# Altium PCB E4_TP2_Flyback.PcbDoc
Units mm, origin at the board's own origin, x right, y up, seen from the top; angles counter-clockwise.
Board outline 100 x 70 mm, 2 copper layers (Top Layer, Bottom Layer); 40 components, 26 nets, 119 pads, 6 vias.
Unrouted connection lines stored in the file: 2.
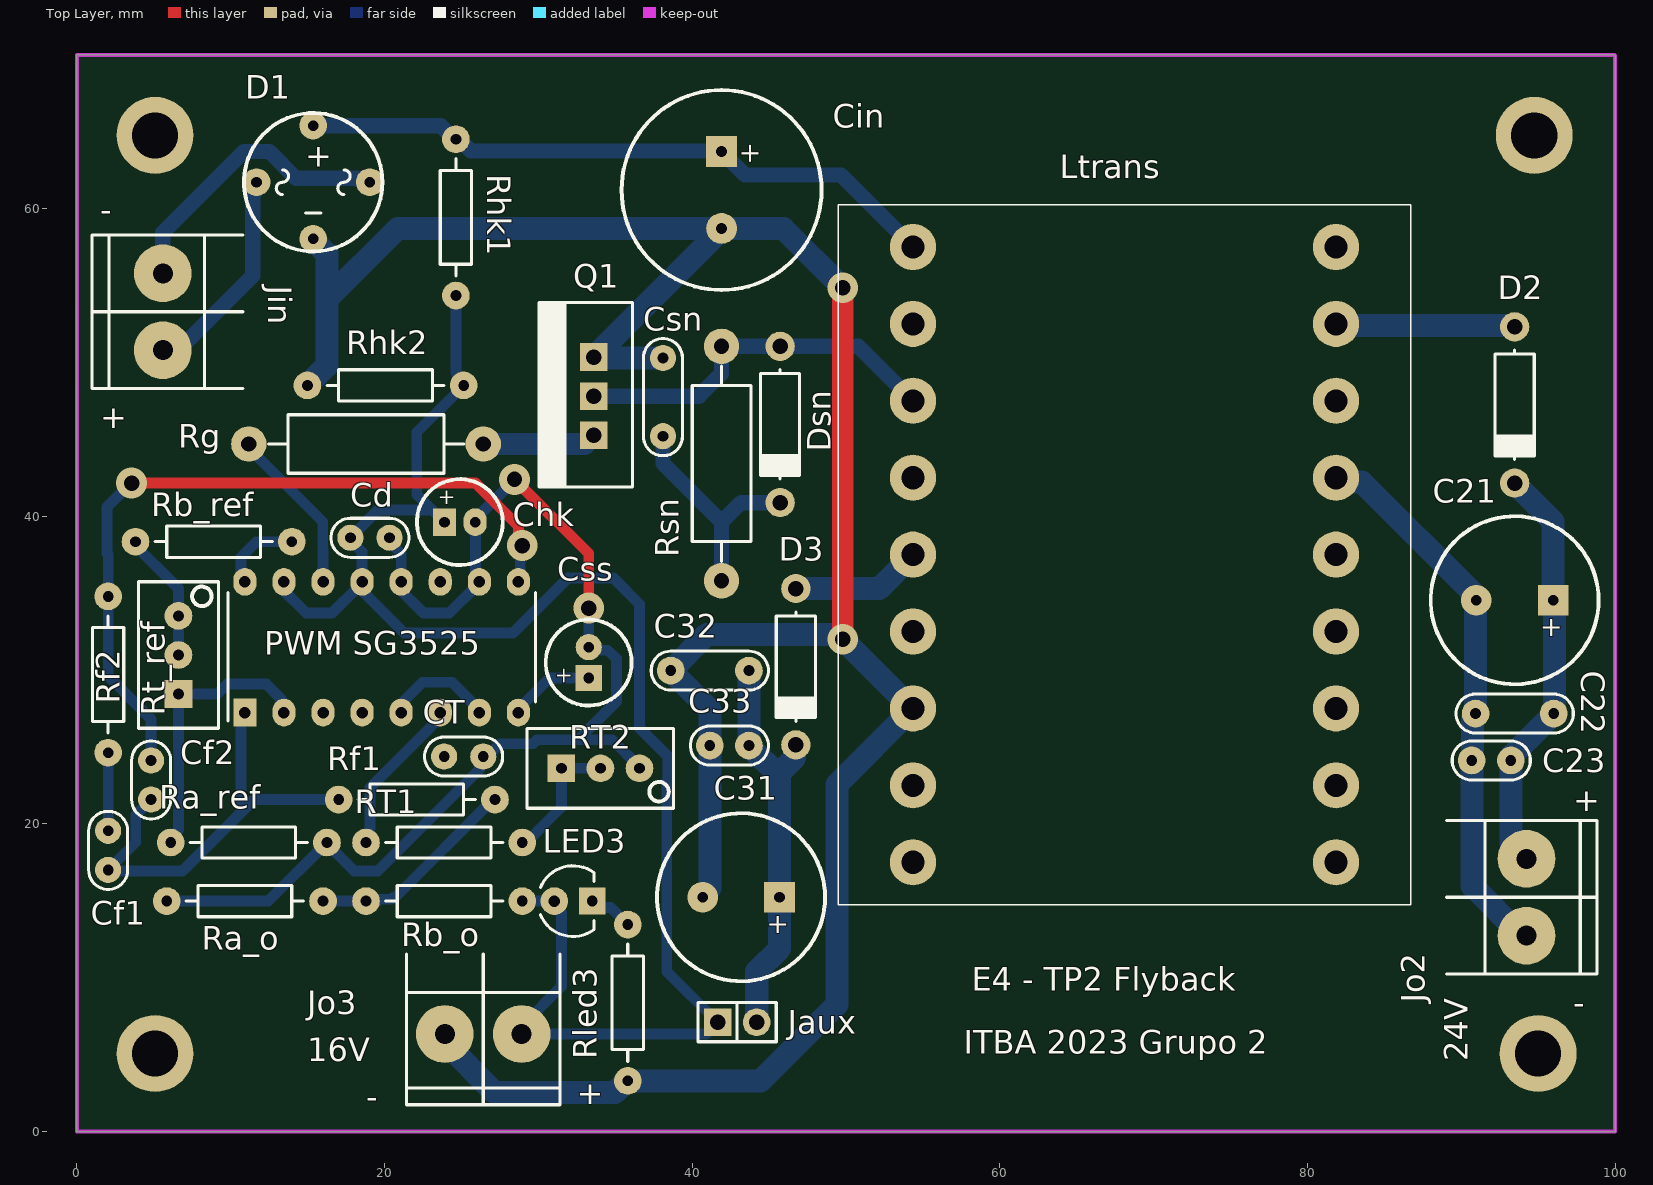
[diagram p0: Top Layer view]
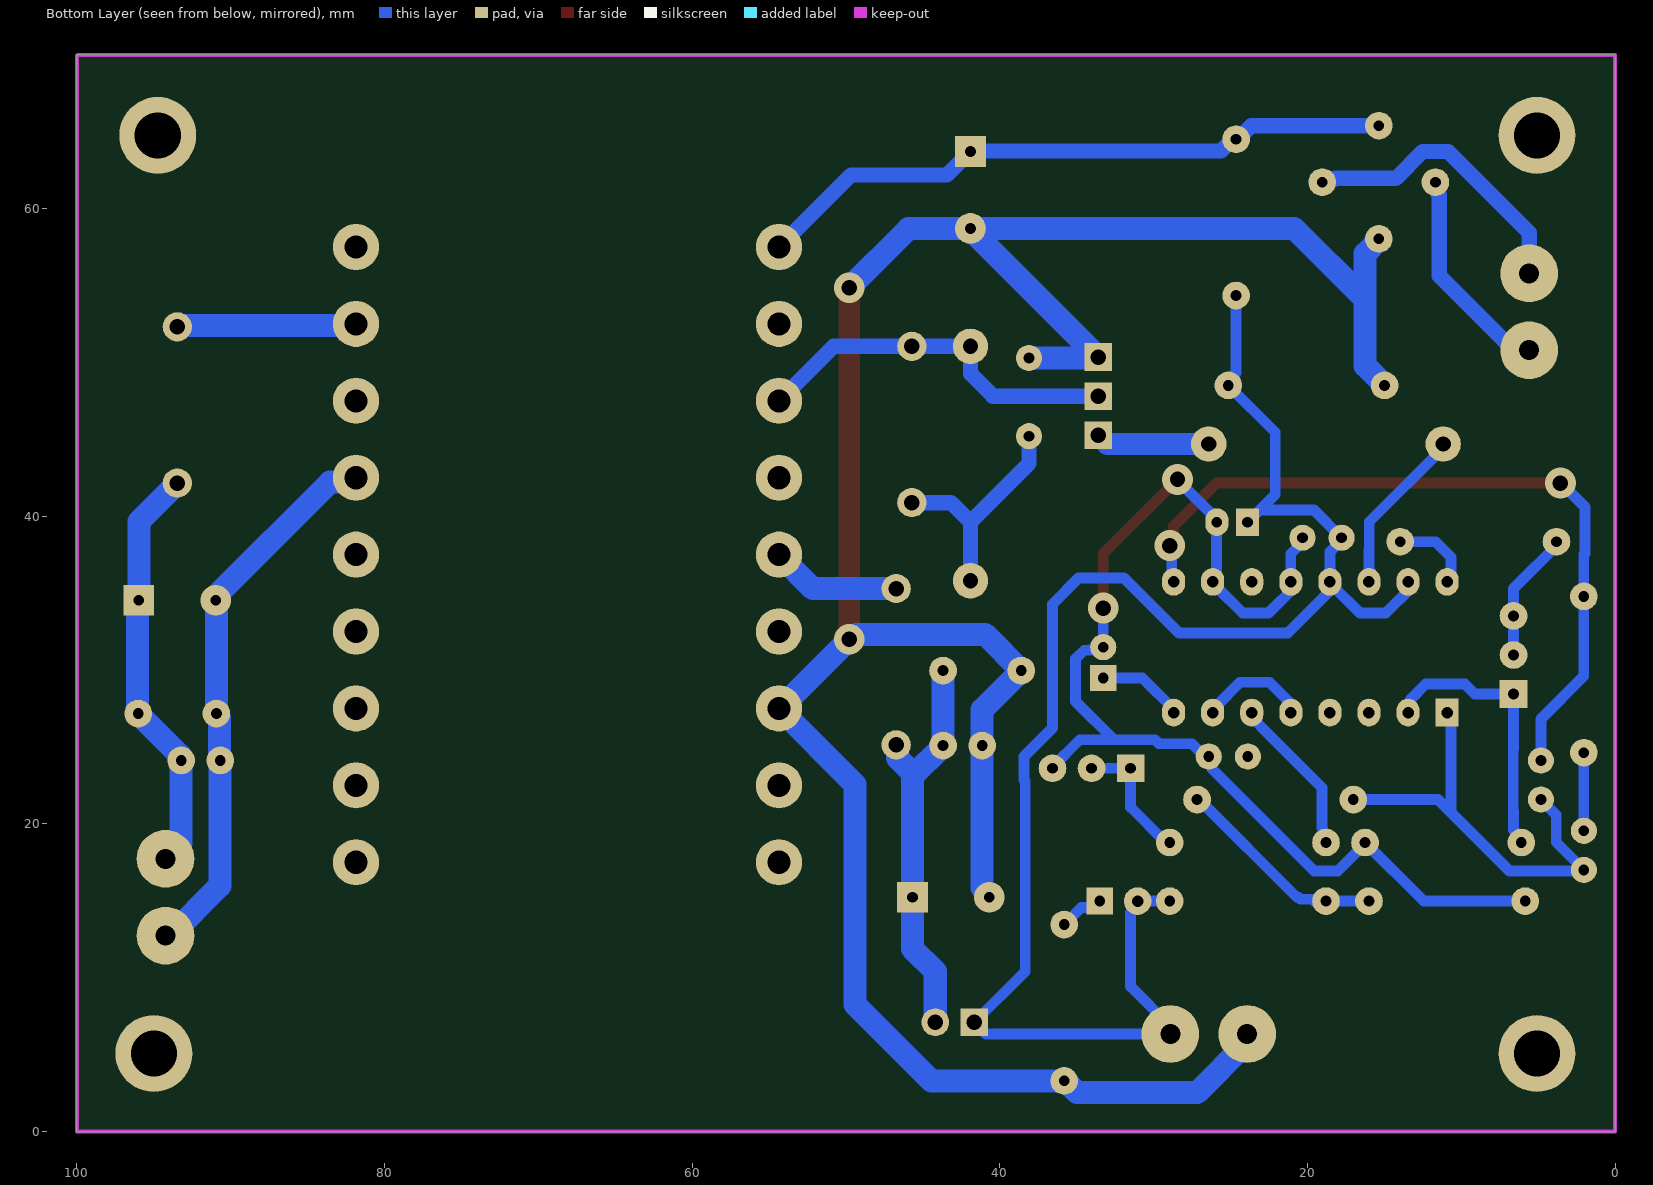
[diagram p1: Bottom Layer view, seen from below]
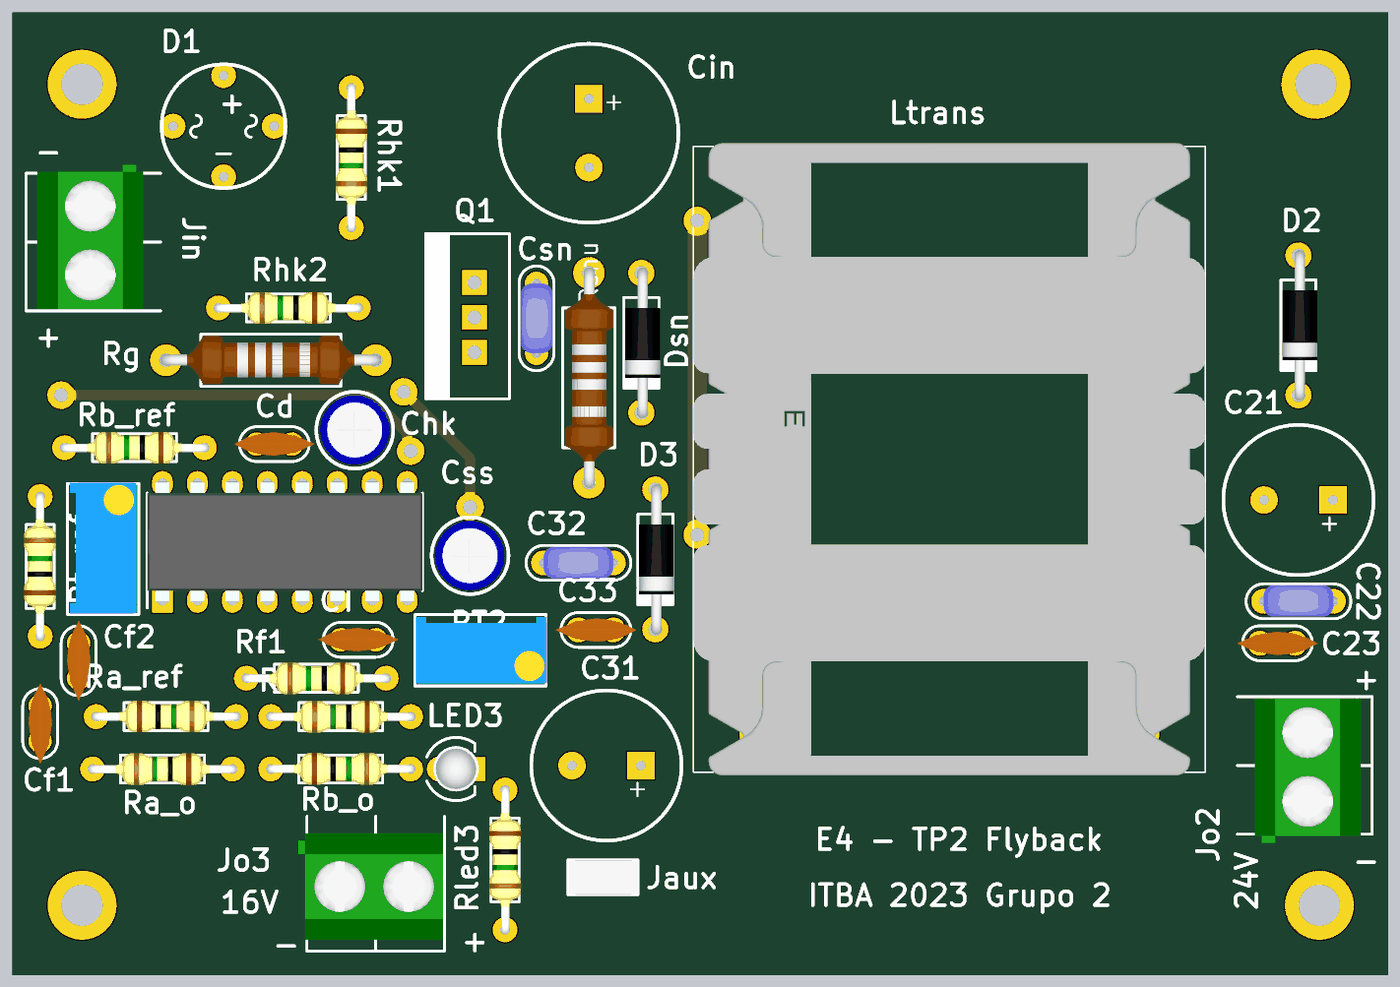
[diagram p2: 3D render of the assembled board from above, using the file's embedded part models]

## Layer stack, top to bottom
Top Solder: solder mask 0.0102, Solder Resist, Dk 3.5
Top Layer: signal copper 0.0356
Dielectric 1: dielectric 0.32, FR-4, Dk 4.8
Bottom Layer: signal copper 0.0356
Bottom Solder: solder mask 0.0102, Solder Resist, Dk 3.5

## Board outline
0,0 0,70 99.972,70 100,69.972 100,0

## Design rules (kind name [scope] priority, off if disabled: settings)
Clearance [All] p1: gap=0.6 ignorepadtopadclearanceinfootprint=FALSE
PolygonConnect [All] p1: connectstyle=Relief reliefconductorwidth=0.254 reliefentries=4 polygonreliefangle="90 Angle" airgapwidth=0.254
RoutingVias [All] p1: holewidth=0.711 width=1.5 viastyle="Through Hole" minholewidth=0.711 minwidth=1.5 maxholewidth=0.711 maxwidth=1.5
SolderMaskExpansion [All] p1: expansion=0.102 istentingtop=FALSE
Width [All] p1: maxlimit=1.5 minlimit=0.7 preferedwidth=0.7
30 further rules are at their usual default settings.

## Classes and differential pairs
component class E4_TP2_Flyback: C21 C22 C23 C31 C32 C33 Cd Cf1 Cf2 Chk Cin Csn CT D1 D2 D3 Dsn Jaux Jin Jo2 Ltrans "PWM SG3525" Ra_ref Rb_o Rb_ref Rf1 Rf2 Rg Rhk1 Rhk2 Rled3 Rsn RT1 RT2 Rt_ref

## Components (designator, comment, footprint, x,y, rotation, side; value= is the part's Value field where it differs from the comment)
C21 "47u" CAP200RP 93.472,34.544 r180 top
C22 "1u" CAP200#1 93.472,27.178 r180 top
C23 "100n" CAP100#1 91.948,24.13 r180 top
C31 "47u" CAP200RP 43.18,15.24 r180 top
C32 "1u" CAP200#1 41.148,29.972 r180 top
C33 "100n" CAP100#1 42.418,25.099 r180 top
Cd "100n" CAP100#2 19.05,38.608 r0 top
Cf1 "53n" CAP100#2 2.032,18.288 r270 top
Cf2 "106p" CAP100#2 4.826,22.86 r270 top
Chk "6.8u" CAP100RP#1 24.892,39.624 r0 top
Cin "220u" CAP200RP2 41.91,61.214 r270 top
Csn "4.7n" CAP200#2 38.1,47.752 r90 top (schematic designator Csnu)
Css "5u" CAP100RP#2 33.274,30.496 r90 top
CT "3.3n" CAP100#2 25.146,24.384 r0 top
D1 "W10M" "PUENTE - W10M" 15.361,65.399 r0 top
D2 "MUR160" DO41 93.472,47.244 r270 top
D3 "MUR160" DO41 46.736,30.226 r270 top
Dsn "DIODO SCHOTTKY" DO41 45.72,45.974 r270 top (schematic designator Dsnu)
Jaux "JUMPER" JUMPER2 42.926,7.112 r0 top
Jin "BORNERA 2" BORNERA2 5.588,53.3 r0 top
Jo2 "BORNERA 2" BORNERA2 94.234,15.24 r180 top
Jo3 "BORNERA 2" BORNERA2 26.416,6.35 r90 top
LED3 "LED" LED3 32.258,14.986 r0 top
Ltrans "B66243B1018T001" B66243B1018T001 68.106,37.512 r270 top
"PWM SG3525" "SG3525AN" DIP850W50P254L2000H510Q16N 19.812,31.496 r90 top (schematic designator PWM)
Q1 "MOSFET N" "TO-220 V" 33.591,47.816 r90 top
Ra_o "5.6k" RES400 16.002,14.986 r180 top
Ra_ref "10k" RES400 6.096,18.796 r0 top
Rb_o "33k" RES400 18.796,14.986 r0 top
Rb_ref "10k" RES400 13.97,38.354 r180 top
Rf1 "520" RES400 27.178,21.59 r180 top
Rf2 "20k" RES400 2.032,24.638 r90 top
Rg "56" RES600 11.176,44.704 r0 top
Rhk1 "500k" RES400 24.638,64.516 r270 top
Rhk2 "27k" RES400 25.146,48.514 r180 top
Rled3 "820" RES400 35.814,13.462 r270 top
Rsn "47" RES600 41.91,51.054 r270 top (schematic designator Rsnu)
RT1 "2k2" RES400 28.956,18.796 r180 top
RT2 "PRESET 1k" "PRESET V" 34.036,23.622 r0 top
Rt_ref "PRESET 5k" "PRESET V" 6.604,30.988 r90 top (schematic designator Rtrim_ref)

## Footprints (in the part's own frame and the unit in brackets; to place one, negate y for a bottom-side part, rotate by r counter-clockwise, add the part's x,y. Pads: shape width x height; smd on the part's side, far side on the other; paste and mask are expansions set on the pad)
B66243B1018T001 [mm]
  round 3 hole 1.5: 1(-20,-13.75) 2(-20,13.75) 3(-15,-13.75) 4(-15,13.75) 5(-10,-13.75) 6(-10,13.75) 7(-5,-13.75) 8(-5,13.75) 9(0,-13.75) 10(0,13.75) 11(5,-13.75) 12(5,13.75) 13(10,-13.75) 14(10,13.75) 15(15,-13.75) 16(15,13.75) 17(20,-13.75) 18(20,13.75)
  silkscreen extent -22.75,-18.6 22.75,18.6, body extent -23,-18.6 23,18.6, height 45.6
BORNERA2 [mm] "Bornera con Tornillos 5mm separación"
  round 3.75 hole 1.3: 1(0,2.5) 2(0,-2.5)
  silkscreen extent -4.6,-5 5.2,5, body extent -3.76,-4.89 3.94,5.61, height 10
CAP100#1 [mm]
  round 1.8 hole 0.7: 1(-1.27,0) 2(1.27,0)
  silkscreen extent -2.54,-1.27 2.54,1.27, body extent -2.92,-0.84 2.92,0.86, height 6.12
CAP100#2 [mm]
  round 1.7 hole 0.7: 1(-1.27,0) 2(1.27,0)
  silkscreen extent -2.54,-1.27 2.54,1.27, body extent -2.92,-0.84 2.92,0.86, height 6.12
CAP100RP#1 [mm] "Body diameter 5mm"
  rect 1.5x1.8 hole 0.7: 1(-1,0)
  oval 1.5x1.8 hole 0.7: 2(1,0)
  silkscreen extent -2.79,-2.79 2.79,2.79, body extent -2.53,-2.51 2.53,2.54, height 11.53
CAP100RP#2 [mm] "Body diameter 5mm"
  rect 1.7x1.7 hole 0.7: 1(-1,0)
  round 1.7 hole 0.7: 2(1,0)
  silkscreen extent -2.79,-2.79 2.79,2.79, body extent -2.53,-2.51 2.53,2.54, height 11.53
CAP200#1 [mm]
  round 1.8 hole 0.7: 1(-2.54,0) 2(2.54,0)
  silkscreen extent -3.81,-1.27 3.81,1.27, body extent -2.79,-1.17 2.79,1.12, height 6.24
CAP200#2 [mm]
  round 1.7 hole 0.7: 1(-2.54,0) 2(2.54,0)
  silkscreen extent -3.81,-1.27 3.81,1.27, body extent -2.79,-1.17 2.79,1.12, height 6.24
CAP200RP [mm] "Body Diameter 10.33mm"
  rect 2x2 hole 0.7: 1(-2.5,0)
  round 2 hole 0.7: 2(2.5,0)
  silkscreen extent -5.46,-5.46 5.46,5.46, body extent -5.2,-5.18 5.18,5.21, height 20
CAP200RP2 [mm] "Body Diameter 12.5mm"
  rect 2x2 hole 0.7: 1(-2.5,0)
  round 2 hole 0.7: 2(2.5,0)
  silkscreen extent -6.5,-6.5 6.5,6.5, body extent -6.25,-6.23 6.2,6.25, height 20
DIP850W50P254L2000H510Q16N [mm]
  rect 1.8x1.5 hole 0.75: 1(-4.25,8.89)
  oval 1.8x1.5 hole 0.75: 2(-4.25,6.35) 3(-4.25,3.81) 4(-4.25,1.27) 5(-4.25,-1.27) 6(-4.25,-3.81) 7(-4.25,-6.35) 8(-4.25,-8.89) 9(4.25,-8.89) 10(4.25,-6.35) 11(4.25,-3.81) 12(4.25,-1.27) 13(4.25,1.27) 14(4.25,3.81) 15(4.25,6.35) 16(4.25,8.89)
  silkscreen extent -4.8,-10 3.55,10, body extent -4.38,-10 4.38,10, height 5.1
DO41 [mm]
  round 1.9 hole 1: 1(-5.08,0) 2(5.08,0)
  silkscreen extent -3.56,-1.27 3.56,1.27, body extent -5.46,-1.19 5.46,1.37, height 2.03
JUMPER2 [mm]
  rect 1.8x1.8 hole 1.016: 1(-1.27,0)
  round 1.8 hole 1.016: 2(1.27,0)
  silkscreen extent -2.54,-1.27 2.54,1.27, body extent -2.46,-1.27 2.54,1.27, height 9.5
LED3 [mm]
  round 1.8 hole 0.75: 1(-1.219,0)
  rect 1.75x1.75 hole 0.7: 2(1.245,0)
  silkscreen extent -2.13,-2.3 1.36,2.3, body extent -1.65,-1.63 1.65,1.66, height 0.49
"PRESET V" [mm]
  rect 1.8x1.8 hole 0.7: 1(-2.54,0)
  round 1.8 hole 0.7: 2(0,0) 3(2.54,0)
  silkscreen extent -4.76,-2.6 4.76,2.6, body extent -4.7,-2.42 4.83,2.42, height 11.55
"PUENTE - W10M" [mm]
  round 1.8 hole 0.7: 1(0,0) 2(-3.677,-3.677) 3(0,-7.354) 4(3.677,-3.677)
  silkscreen extent -4.5,-8.18 4.5,0.82
RES400 [mm]
  round 1.8 hole 0.7: 1(0,0) 2(10.16,0)
  silkscreen extent 1.27,-1.02 8.89,1.02, body extent -0.3,-1.14 10.46,1.17, height 2.43
RES600 [mm]
  round 2.3 hole 1: 1(0,0) 2(15.24,0)
  silkscreen extent 1.27,-1.91 13.97,1.91, body extent -0.4,-1.72 15.64,1.78, height 3.59
"TO-220 V" [mm]
  rect 1.8x1.8 hole 1: 1(-2.54,0) 2(0,0) 3(2.54,0)
  silkscreen extent -5.9,-2.54 6.1,3.54, body extent -5,-2 5,3, height 18

## Part data
C21 C31 Chk Cin Css: library part CAPPOL
C22 C23 C32 C33 Cd Cf1 Cf2 Csn CT: library part CAP
D1: library part PUENTE
D2 D3: library part DIODO
Ltrans: "Inductor", Manufacturer_Name=TDK, Mouser Part Number=N/A, Arrow Part Number=B66243B1018T001, Arrow Price/Stock=https://www.arrow.com/en/products/b66243b1018t001/epcos-tdk, Datasheet Link=https://product.tdk.com/system/files/dam/doc/product/ferrite/ferrite/ferrite-acc/data_sheet/80/db/fer/e_42_21_20.pdf, Height=51mm, Manufacturer_Part_Number=B66243B1018T001, Mouser Price/Stock=https://www.mouser.co.uk/ProductDetail/EPCOS-TDK/B66243B1018T001?qs=W0yvOO0ixfHL1dNOx1DZxg%3D%3D
"PWM SG3525": "Integrated Circuit", Manufacturer_Name=STMicroelectronics, Mouser Part Number=511-SG3525AN, Arrow Part Number=SG3525AN, Arrow Price/Stock=https://www.arrow.com/en/products/sg3525an/stmicroelectronics?region=nac, Datasheet Link=http://componentsearchengine.com/Datasheets/3/SG3525AN.pdf, Height=5.1mm, Manufacturer_Part_Number=SG3525AN, Mouser Price/Stock=https://www.mouser.co.uk/ProductDetail/STMicroelectronics/SG3525AN?qs=lgHKUCmDFthRkkwDjx3E7g%3D%3D
Ra_o Ra_ref Rb_o Rb_ref Rf1 Rf2 Rg Rhk1 Rhk2 Rled3 Rsn RT1: library part RES
RT2 Rt_ref: library part PRESET

## Free pads (board coordinates)
  round 5 hole 3: 2(5.08,64.77) 3(94.742,64.77) 4(5.08,5.08) 5(94.996,5.08)

## Via types
v1: diameter 2, hole 1, Top Layer to Bottom Layer, 6 vias

## Nets (pads, with @x,y where several pads share a name; then routed paths per layer and width w, separated by ;. In a path a pad name is that pad's centre, name@x,y a point inside that pad or via, vN(x,y) a via of type N, cw(c..) or ccw(c..) an arc to the next point about the centre after c; other vN are vias at no path point)
NetC31_1: C31.1 C32.1 C33.1 D3.2 Jaux.2 | length 26.1
  Bottom Layer w1.5: C32.1 C33.1 45.68,23.107 C31.1 45.68,11.898 44.196,10.414 Jaux.2 ; 45.974,23.622 46.659,24.307 46.659,25.069 D3.2
NetCf1_1: Cf1.1 Rf2.1 | length 5.1
  Bottom Layer w0.7: Cf1.1 Rf2.1
NetCf1_2: "PWM SG3525.1" Cf1.2 Cf2.2 Rf1.2 | length 29.2
  Bottom Layer w0.7: Cf1.2@2.032,16.946 6.862,16.946 10.668,20.752 ; Cf1.2 2.038,17.018 3.832,18.812 3.832,20.579 4.826,21.573 Cf2.2@4.826,21.844 ; 10.668,27.06 10.668,20.752 ; Rf1.2 11.506,21.59 10.668,20.752
NetCf2_1: "PWM SG3525.9" Cf2.1 Rf2.2 | length 50.3
  Top Layer w0.7: v1(3.556,42.164) 25.906,42.164 28.707,39.363 28.707,38.349 v1(28.956,38.1)
  Bottom Layer w0.7: v1(3.556,42.164) 3.517,42.164 1.96,40.607 1.96,37.588 2.032,37.516 Rf2.2 2.032,29.622 4.826,26.828 Cf2.1 ; 28.448,35.56 28.601,35.713 ; 28.702,35.746 28.829,35.873 28.829,37.973 v1(28.956,38.1)
NetCsnu_1: Csn.1 Dsn.2 Rsn.2 | length 15.8
  Bottom Layer w0.7: Dsn.2@45.72,40.943 Dsn.2@45.998,40.664
  Bottom Layer w1: Csn.1 38.1,43.434 41.91,39.624 ; Rsn.2 41.91,39.624 ; Dsn.2@45.72,40.943 Dsn.2 43.18,40.894 41.91,39.624
NetCss_1: "PWM SG3525.8" Css.1 | length 5.9
  Bottom Layer w0.7: 28.448,27.06 28.668,27.28 28.668,27.43 30.734,29.496 Css.1
NetCT_1: "PWM SG3525.5" "PWM SG3525.7" CT.1 | length 7.4
  Bottom Layer w0.7: 21.082,27.246 21.082,27.832 22.46,29.21 24.384,29.21 25.919,27.675 25.919,27.071 25.908,27.06 ; CT.1 CT.1@23.974,24.482
NetLED3_2: LED3.2 Rled3.1 | length 2.9
  Bottom Layer w0.7: LED3.2 33.924,14.565 34.711,14.565 Rled3.1
NetPWM_6: "PWM SG3525.6" RT1.2 | length 10.2
  Bottom Layer w0.7: RT1.2 19.006,19.006 19.006,19.713 19.05,19.756 19.05,22.352 22.968,26.27 22.968,26.294 23.368,26.694 23.368,27.06
NetPWM_16: "PWM SG3525.16" Rb_ref.1 | length 4.7
  Bottom Layer w0.7: 10.668,35.56 10.668,37.338 11.684,38.354 Rb_ref.1@13.208,38.354
NetQ1_1: Q1.1 Rg.2 | length 7.8
  Bottom Layer w1.4: Rg.2@26.032,44.704 Rg.2 33.02,44.704 Q1.1
NetRb_ref_2: Rb_ref.2 Rt_ref.2 Rt_ref.3 | length 8.6
  Bottom Layer w0.7: Rb_ref.2@3.556,38.354 6.604,35.306 Rt_ref.2
NetRT1_1: RT1.1 RT2.1 RT2.2 | length 9
  Bottom Layer w0.7: RT1.1@28.669,19.006 RT1.1@28.956,19.006 ; RT1.1@28.956,18.974 RT1.1@28.956,19.006 ; RT1.1@28.956,19.05 RT1.1@28.956,19.006 ; RT2.2 RT2.1 31.496,21.082 29.21,18.796 29,19.006 RT1.1@28.956,19.006
PGND: "PWM SG3525.10" "PWM SG3525.12" C31.2 C32.2 C33.2 Cd.2 Chk.2 Cin.2 Csn.2 Css.2 CT.2 D1.3 Jo3.1 Ltrans.13 Q1.3 Ra_o.2 Ra_ref.2 Rhk2.2 Rled3.2 RT2.3 | length 248.5
  Top Layer w0.7: v1(28.448,42.404) 33.274,37.578 v1(33.274,34.036)
  Top Layer w1.4: v1(49.784,32.004) v1(49.784,54.864)
  Bottom Layer w0.7: Ra_o.2@6.35,14.986 12.446,14.986 Ra_ref.2 16.256,18.72 18.03,16.946 19.562,16.946 26.225,23.608 26.225,24.193 CT.2 26.687,24.384 27.513,25.21 29.653,25.21 29.915,25.472 32.584,25.472 ; D1.3@15.361,57.98 D1.3 ; Cd.2 20.32,38.337 21.082,37.575 21.082,35.746 ; 20.828,35.56 20.828,35.41 22.528,33.71 24.208,33.71 25.908,35.41 Chk.2@25.908,39.608 ; Chk.2 26.154,39.886 26.135,39.905 26.135,40.054 28.448,42.367 v1(28.448,42.404) ; Css.2 33.465,31.305 34.172,31.305 34.181,31.296 34.518,31.296 35.074,30.74 35.074,27.962 32.584,25.472 ; Css.2@33.274,31.75 v1(33.274,34.036) ; RT2.3 36.576,23.698 34.802,25.472 32.584,25.472 ; Cin.2@41.91,58.674 Cin.2
  Bottom Layer w1.5: Rhk2.2 16.256,49.784 16.256,54.102 ; D1.3@15.361,57.98 16.256,57.085 16.256,54.102 ; Jo3.1 23.916,5.802 27.178,2.54 34.971,2.54 35.733,3.302 Rled3.2 44.45,3.302 49.403,8.255 49.403,22.559 Ltrans.13 ; Q1.3@33.591,50.292 Csn.2 ; Q1.3 Cin.2@41.91,58.674 ; C31.2 40.68,15.375 41.148,15.843 C33.2 41.148,27.432 C32.2 40.962,32.326 49.327,32.326 49.649,32.004 v1(49.784,32.004) Ltrans.13@54.276,27.512 ; v1(49.784,54.864) 45.934,58.714 Cin.2 20.868,58.714 16.256,54.102
PWM: "PWM SG3525.14" Rg.1 | length 11.2
  Bottom Layer w0.7: Rg.1 11.176,44.45 15.98,39.646 15.98,37.862 16.002,37.84 16.002,36.52 15.901,36.419 15.901,35.713 15.748,35.56
SGND: C21.2 C22.2 C23.2 Jo2.1 Ltrans.8 | length 35.6
  Bottom Layer w1.5: Ltrans.8 82.143,42.225 83.545,42.225 C21.2@90.876,34.894 ; C23.2@90.736,24.072 90.701,24.072 90.701,15.979 93.94,12.74 Jo2.1 ; C23.2@90.74,24.192 90.735,24.196 90.735,24.4 90.74,24.404 90.74,26.904 90.932,27.097 C22.2 C21.2@90.932,34.504
Vd: Cin.1 D1.1 Ltrans.1 Rhk1.1 | length 42.3
  Bottom Layer w1: D1.1 23.652,65.399 24.535,64.516 Rhk1.1 24.854,64.516 25.616,63.754 41.87,63.754 43.434,62.19 49.678,62.19 Ltrans.1
Vin+: D1.2 Jin.2 | length 14
  Bottom Layer w1: Jin.2 6.604,50.8 11.43,55.626 11.43,60.902 11.531,61.003 11.531,61.569 D1.2
Vin-: D1.4 Jin.1 | length 19.8
  Bottom Layer w0.7: Jin.1 Jin.1@6.071,56.283
  Bottom Layer w1: Jin.1 5.588,58.454 10.856,63.722 12.512,63.722 14.258,61.976 18.218,61.976 18.319,61.875 18.885,61.875 D1.4
VL1-: Dsn.1 Ltrans.5 Q1.2 Rsn.1 | length 24.6
  Bottom Layer w1: Q1.2 40.45,47.816 41.91,49.276 Rsn.1 46.228,51.054 50.814,51.054 Ltrans.5
VL2: D2.1 Ltrans.4 | length 11.9
  Bottom Layer w0.7: Ltrans.4 Ltrans.4@81.95,52.418 ; D2.1@93.378,52.418 D2.1 D2.1@93.472,52.48
  Bottom Layer w1.5: Ltrans.4@81.95,52.418 D2.1@93.378,52.418
VL3: D3.1 Ltrans.9 | length 8.5
  Bottom Layer w1.5: D3.1 52.15,35.306 Ltrans.9
Vo2: C21.1 C22.1 C23.1 D2.2 Jo2.2 | length 26.9
  Bottom Layer w1.5: D2.2 95.972,39.664 C21.1 ; Jo2.2 93.218,18.756 C23.1 93.275,24.187 93.275,24.441 C22.1 ; C22.1@96.049,27.215 C21.1@96.049,34.467
Vo3: "PWM SG3525.13" "PWM SG3525.15" Cd.1 Chk.1 Jaux.1 Jo3.2 LED3.1 Rb_o.2 Rhk1.2 Rhk2.1 | length 109.4
  Bottom Layer w0.7: 13.208,35.56 13.208,35.41 14.908,33.71 16.588,33.71 18.288,35.41 ; 18.288,35.926 18.288,35.41 ; 18.542,35.746 18.542,37.698 17.78,38.46 Cd.1 17.78,38.614 19.574,40.408 23.108,40.408 ; Chk.1 23.108,40.408 ; Rhk1.2 24.638,49.32 25.146,48.812 Rhk2.1 22.098,45.466 22.098,41.418 23.108,40.408 ; Rb_o.2 LED3.1 31.039,14.688 31.496,14.231 31.496,9.438 28.916,6.858 Jo3.2 40.894,6.35 Jaux.1 38.354,10.414 38.354,22.784 38.426,22.856 38.426,24.388 36.576,26.238 36.576,34.29 34.88,35.986 31.922,35.986 28.346,32.41 21.288,32.41 18.288,35.41
Vo_comp: Ra_o.1 Rb_o.1 Rf1.1 | length 13.4
  Bottom Layer w0.7: Ra_o.1@16.51,14.986 Rb_o.1 Rb_o.1@19.558,14.986 ; Rb_o.1@19.558,15.113 20.447,15.113 20.574,15.24 20.701,15.24 27.051,21.59 Rf1.1
Vref_comp: "PWM SG3525.2" Ra_ref.1 Rt_ref.1 | length 18.6
  Bottom Layer w0.7: Ra_ref.1 6.096,19.094 6.604,19.602 6.604,20.822 6.626,20.844 6.626,24.876 6.604,24.898 6.604,28.194 6.35,28.448 Rt_ref.1 9.13,28.448 9.778,29.096 12.306,29.096 13.309,28.093 13.309,27.161
pads on no net: "PWM SG3525.3" "PWM SG3525.4" "PWM SG3525.11" Ltrans.2 Ltrans.3 Ltrans.6 Ltrans.7 Ltrans.10 Ltrans.11 Ltrans.12 Ltrans.14 Ltrans.15 Ltrans.16 Ltrans.17 Ltrans.18

## Keep-outs
Keep-Out Layer:
  lines w0.254: 0,0 100,0 100,65.456 100,69.972 99.972,70 0,70 0,0

## Silkscreen, mask and mechanical layers (free items; w line width, h text height)
Top Overlay:
  text "-" at 1.524,59.182 h1.52
  text "+" at 1.524,45.72 h1.52
  text "+" at 97.282,20.828 h1.52
  text "E4 - TP2 Flyback" at 58.166,9.144 h1.52
  text "-" at 97.282,7.62 h1.52
  text "ITBA 2023 Grupo 2" at 57.658,5.08 h1.52
  text "16V" at 14.986,4.572 h1.52
  text "24V" at 90.424,4.572 h1.52 r90
  text "+" at 32.512,1.778 h1.52
  text "-" at 18.796,1.524 h1.52

## Text inside footprints (layer, text, board x,y; h text height)
C21: Top Overlay "+" at 96.596,33.299 h1.27 r180
C31: Top Overlay "+" at 46.304,13.995 h1.27 r180
Chk: Top Overlay "+" at 23.444,40.792 h1.02
Cin: Top Overlay "+" at 43.231,64.313 h1.27 r270
Css: Top Overlay "+" at 32.106,29.048 h1.02 r90
D1: Top Overlay "+" at 14.861,62.722 h1.52